# EAGLE board esp32-driver (EAGLE 9.6.2)
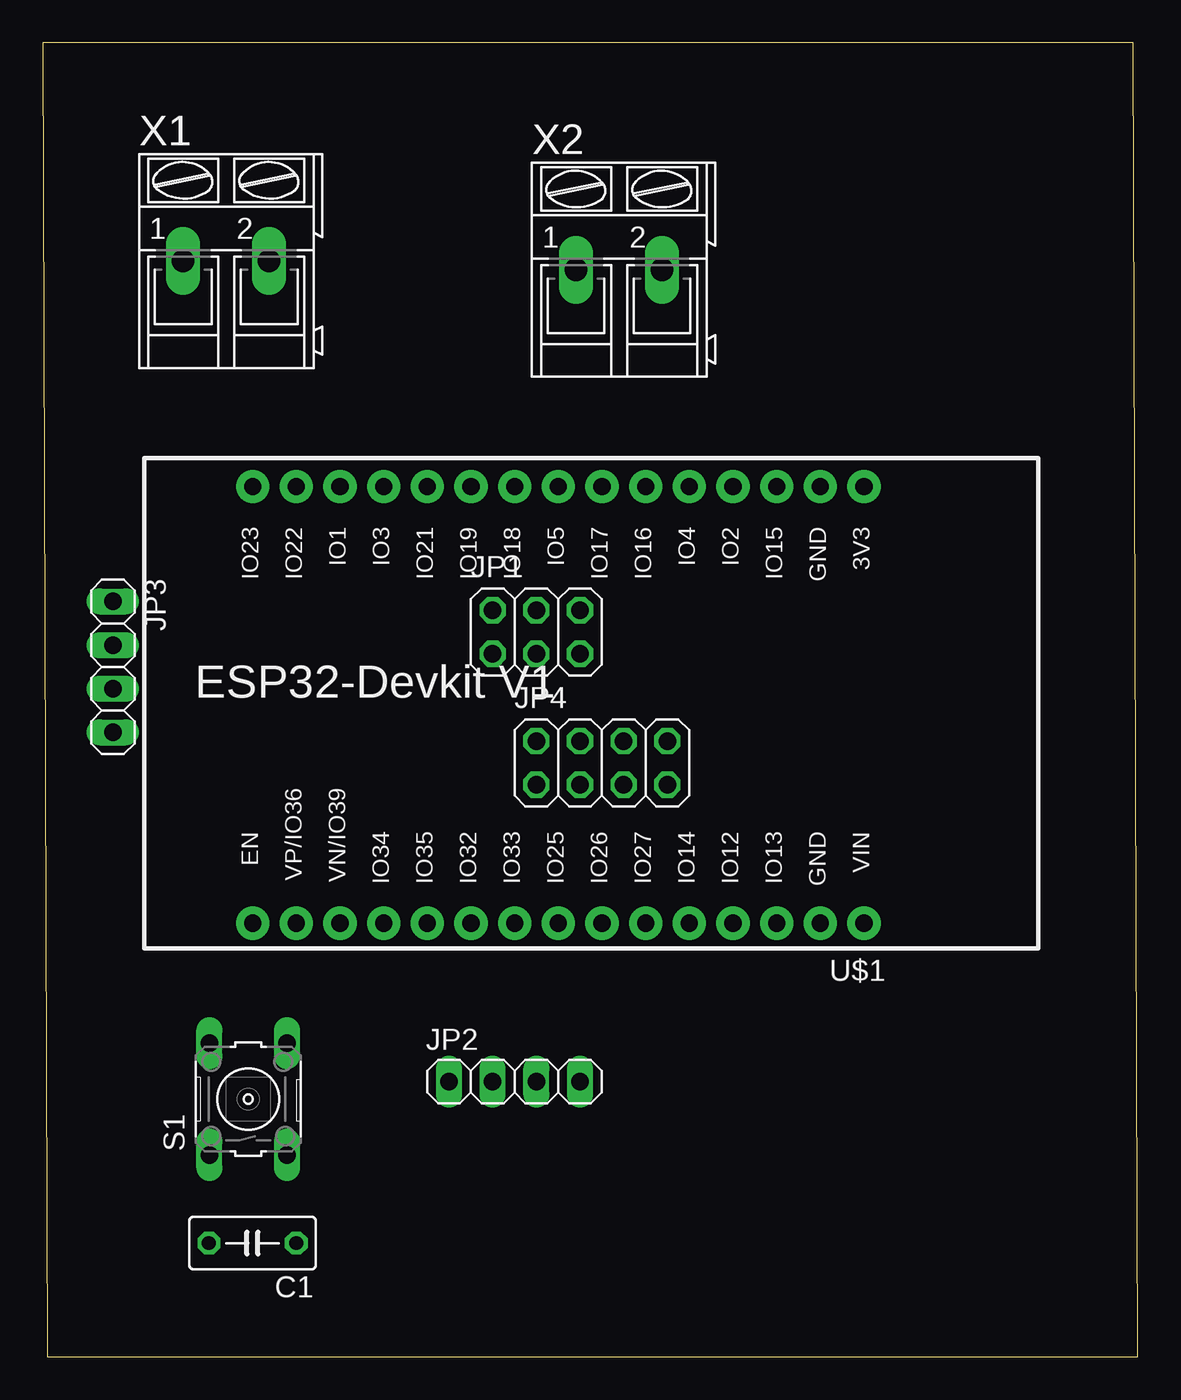
[diagram p0: board, top side]
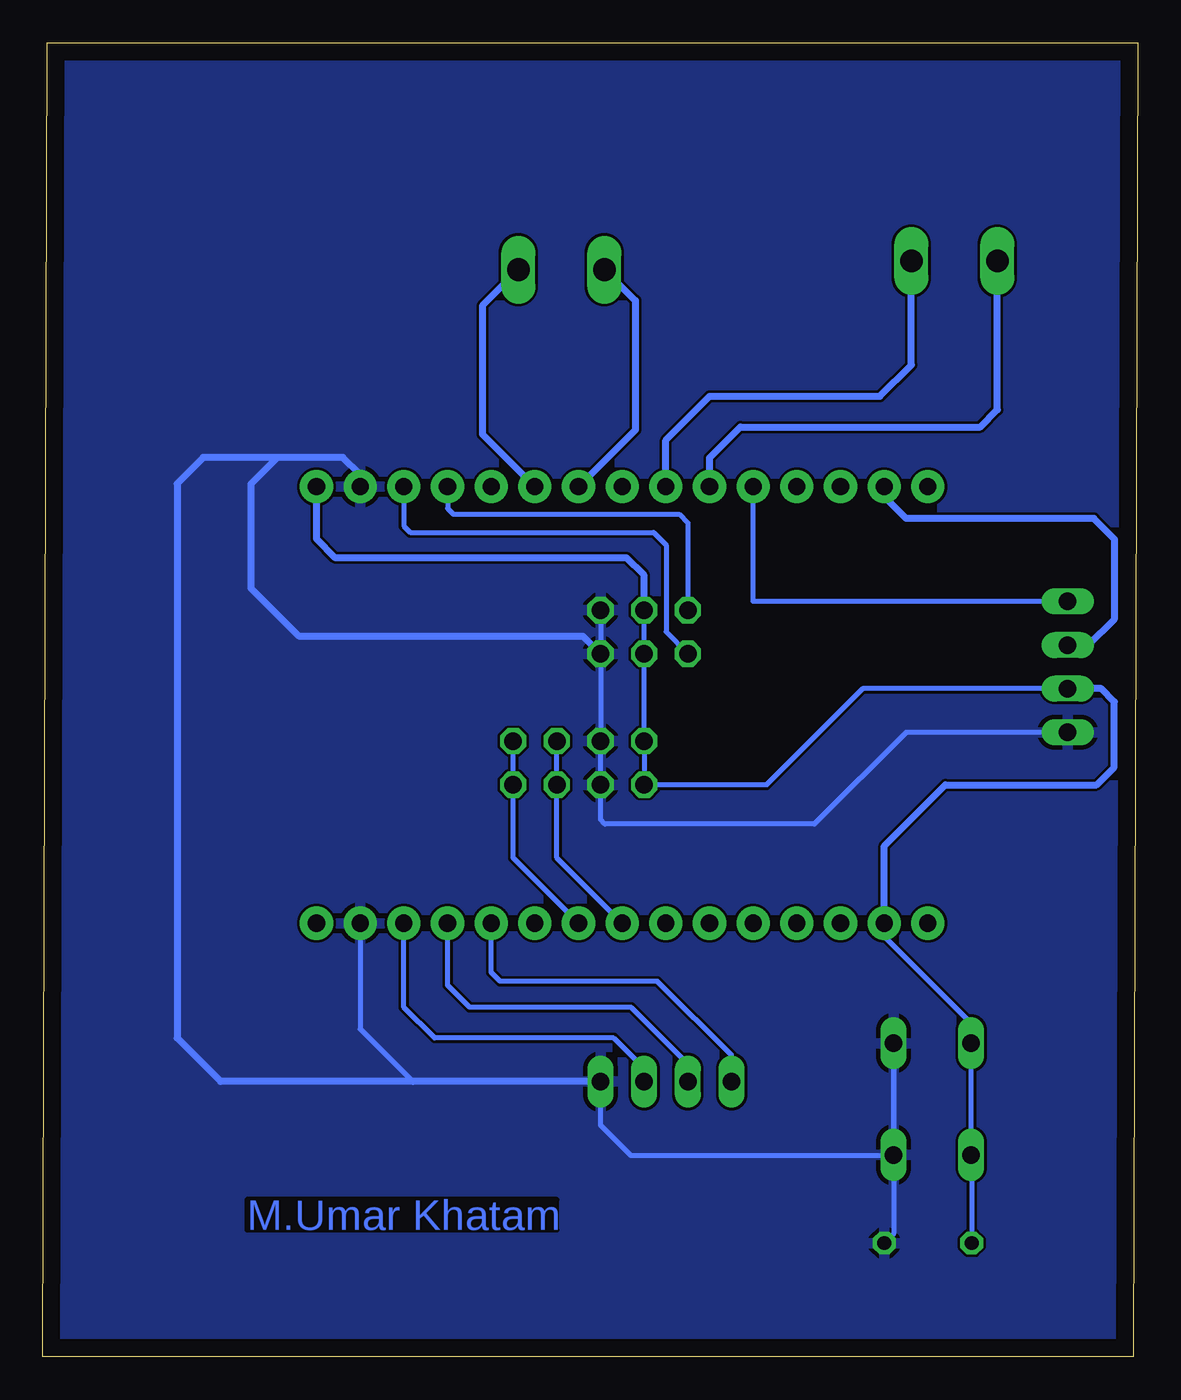
[diagram p1: board, bottom side, seen from below]

Size 63.68 x 76.44 mm. Coordinates in mm from the lower left corner, seen from the top.
Outline: 0.25,0 63.68,0 63.42,76.44 0,76.44 0.25,0
Copper layers (1*16): Top 0.035mm / dielectric 1.5mm / Bottom 0.035mm
Design rules "default": minimum track width 6mil, minimum drill 0.35mm, track to track 6mil, track to pad 6mil, pad to pad 6mil, via to via 6mil, smd to smd 6mil, copper to edge 40mil, drill to drill 6mil, minimum pad ring 10mil, minimum via ring 8mil, stop-mask expansion 4mil, vias tented up to drill 0mil, thermal gap 10mil

## Footprints (pad centres in the part's own frame; a part is rotated, then mirrored left to right if it is on the bottom)
C050-030X075 = drill 0.813 octagon: 1 -2.54,0; 2 2.54,0
2X03 = drill 1.016 octagon: 1 -2.54,-1.27; 2 -2.54,1.27; 3 0,-1.27; 4 0,1.27; 5 2.54,-1.27; 6 2.54,1.27
1X04 = drill 1.016 long: 1 -3.81,0; 2 -1.27,0; 3 1.27,0; 4 3.81,0
2X04 = drill 1.016 octagon: 1 -3.81,-1.27; 2 -3.81,1.27; 3 -1.27,-1.27; 4 -1.27,1.27; 5 1.27,-1.27; 6 1.27,1.27; 7 3.81,-1.27; 8 3.81,1.27
B3F-10XX = drill 1.016 long: 1 -3.251,2.261; 2 3.251,2.261; 3 -3.251,-2.261; 4 3.251,-2.261
ESP32-DEVKITV1 = drill 1 pad 1.93: 3V3 -16.52,-12.27; D1 13.96,-12.27; D2 -8.9,-12.27; D3 11.42,-12.27; D4 -6.36,-12.27; D5 1.26,-12.27; D12 -8.9,13.135; D13 -11.44,13.135; D14 -6.36,13.135; D15 -11.44,-12.27; D16 -3.82,-12.27; D17 -1.28,-12.27; D18 3.8,-12.27; D19 6.34,-12.27; D21 8.88,-12.27; D22 16.5,-12.27; D23 19.04,-12.27; D25 1.26,13.135; D26 -1.28,13.135; D27 -3.82,13.135; D32 6.34,13.135; D33 3.8,13.135; D34 11.42,13.135; D35 8.88,13.135; D36 16.5,13.135; D39 13.96,13.135; EN 19.04,13.135; GND@1 -13.98,13.135; GND@2 -13.98,-12.27; VIN -16.52,13.135
AK300/2 = drill 1.321 long: 1 -2.515,0; 2 2.489,0

## Placement (x,y rotation side)
C1  [C050-030X075]  12.19,6.6 180 top
JP1  [2X03]  28.7,42.16 0 top
JP2  [1X04]  27.43,16 0 top
JP3  [1X04]  4.06,40.13 270 top
JP4  [2X04]  32.51,34.54 0 top
S1  [B3F-10XX]  11.94,14.99 90 top
U$1  ESP32DEVKITV1  [ESP32-DEVKITV1]  31.24,38.35 180 top
X1  [AK300/2]  10.67,63.75 0 top
X2  [AK300/2]  33.53,63.25 0 top

## Library data of the parts
C1 = rcl; SPICEPREFIX: C
JP1-JP4 = pinhead
S1 = switch-omron; MPN: B3F-1000; OC_FARNELL: 176432; OC_NEWARK: 36M3542
U$1 = esp32-devkitv1
X1 X2 = con-ptr500; OC_FARNELL: unknown; OC_NEWARK: unknown

## Nets
GND: C1.1 JP1.5 JP1.6 JP2.4 JP3.4 JP4.3 JP4.4 S1.3 S1.4 U$1.GND@1 U$1.GND@2
MOISTURE: JP1.2 U$1.D2
N$1: U$1.D19 X1.1
N$2: U$1.D18 X1.2
N$3: U$1.D17 X2.1
N$4: U$1.D16 X2.2
OUT1: JP2.1 U$1.D14
OUT2: JP2.2 U$1.D12
OUT3: JP2.3 U$1.D13
PH: JP1.1 U$1.D15
SCL: JP3.2 U$1.D22
SCL2: JP4.5 JP4.6 U$1.D25
SDA: JP3.1 U$1.D21
SDA2: JP4.7 JP4.8 U$1.D26
V: C1.2 JP1.3 JP1.4 JP3.3 JP4.1 JP4.2 S1.1 S1.2 U$1.3V3 U$1.D36
VIN: U$1.VIN

## Tracks (layer width: path | path; a pad name or v marks a point on that pad's centre or on a via)
GND
  Bottom 0.305: JP2.4 31.24,13.46 29.46,11.68 14.2,11.68 S1.4 S1.3 14.2,7.14 C1.1 | U$1.GND@1 45.22,19.06 42.16,16 | JP3.4 13.46,36.32 18.8,30.99 30.99,30.99 31.24,31.24 JP4.3 JP4.4 JP1.5 JP1.6
  Bottom 0.406: JP1.5 32.26,41.91 48.77,41.91 51.56,44.7 51.56,50.8 50.04,52.32 | JP2.4 42.16,16 53.34,16 55.88,18.54 55.88,50.8 54.36,52.32 50.04,52.32 | U$1.GND@2 45.22,51.32 46.23,52.32 50.04,52.32
  pour Bottom: 0,76.45 63.63,76.45 63.63,0 0,0
MOISTURE
  Bottom 0.305: 40.14,49.79 U$1.D2 40.14,49.35 39.81,49.02 26.67,49.02 26.16,48.51 JP1.2
N$1
  Bottom 0.406: U$1.D19 24.9,52.31 23.11,54.1 9.14,54.1 8.15,55.09 X1.1
N$2
  Bottom 0.406: U$1.D18 27.44,53.33 24.89,55.88 14.99,55.88 13.16,57.71 X1.2
N$3
  Bottom 0.406: U$1.D17 29.22,53.93 29.22,61.45 X2.1
N$4
  Bottom 0.406: U$1.D16 38.11,53.67 38.11,61.15 X2.2
OUT1
  Bottom 0.305: JP2.1 23.62,17.53 27.94,21.84 37.08,21.84 37.6,22.36 U$1.D14
OUT2
  Bottom 0.305: JP2.2 26.16,17.02 29.46,20.32 38.86,20.32 40.14,21.6 U$1.D12
OUT3
  Bottom 0.305: JP2.3 28.7,16.76 30.48,18.54 40.89,18.54 42.68,20.33 U$1.D13
PH
  Bottom 0.305: JP1.1 27.43,42.16 27.43,47.23 28.16,47.96 42.3,47.96 42.68,48.34 U$1.D15
SCL
  Bottom 0.406: JP3.2 2.86,41.4 1.33,42.93 1.33,47.56 2.54,48.77 13.46,48.77 14.74,50.05 U$1.D22
SCL2
  Bottom 0.305: JP4.6 JP4.5 33.78,29.02 U$1.D25
SDA
  Bottom 0.305: JP3.1 22.36,43.94 U$1.D21
SDA2
  Bottom 0.305: JP4.8 JP4.7 36.32,29.02 U$1.D26
V
  Bottom 0.305: C1.2 9.65,11.73 S1.1 S1.2 9.68,19.39 14.74,24.46 U$1.D36 | JP3.3 4.32,38.86 16,38.86 21.59,33.27 JP4.1 JP4.2 JP1.3 JP1.4
  Bottom 0.406: U$1.D36 14.73,25.23 14.73,29.72 11.18,33.27 2.38,33.27 1.36,34.29 1.35,38.1 2.11,38.86 4.32,38.86 | JP1.4 28.7,45.47 29.72,46.48 46.67,46.48 47.76,47.58 U$1.3V3

## Text on the board
Bottom: M.Umar Khatam